# Altium PCB base.PcbDoc
Units mm, origin at the board's own origin, x right, y up, seen from the top; angles counter-clockwise.
Board outline 30 x 32.5 mm, 2 copper layers (Top Layer, Bottom Layer); 20 components, 20 nets, 94 pads, 15 vias.
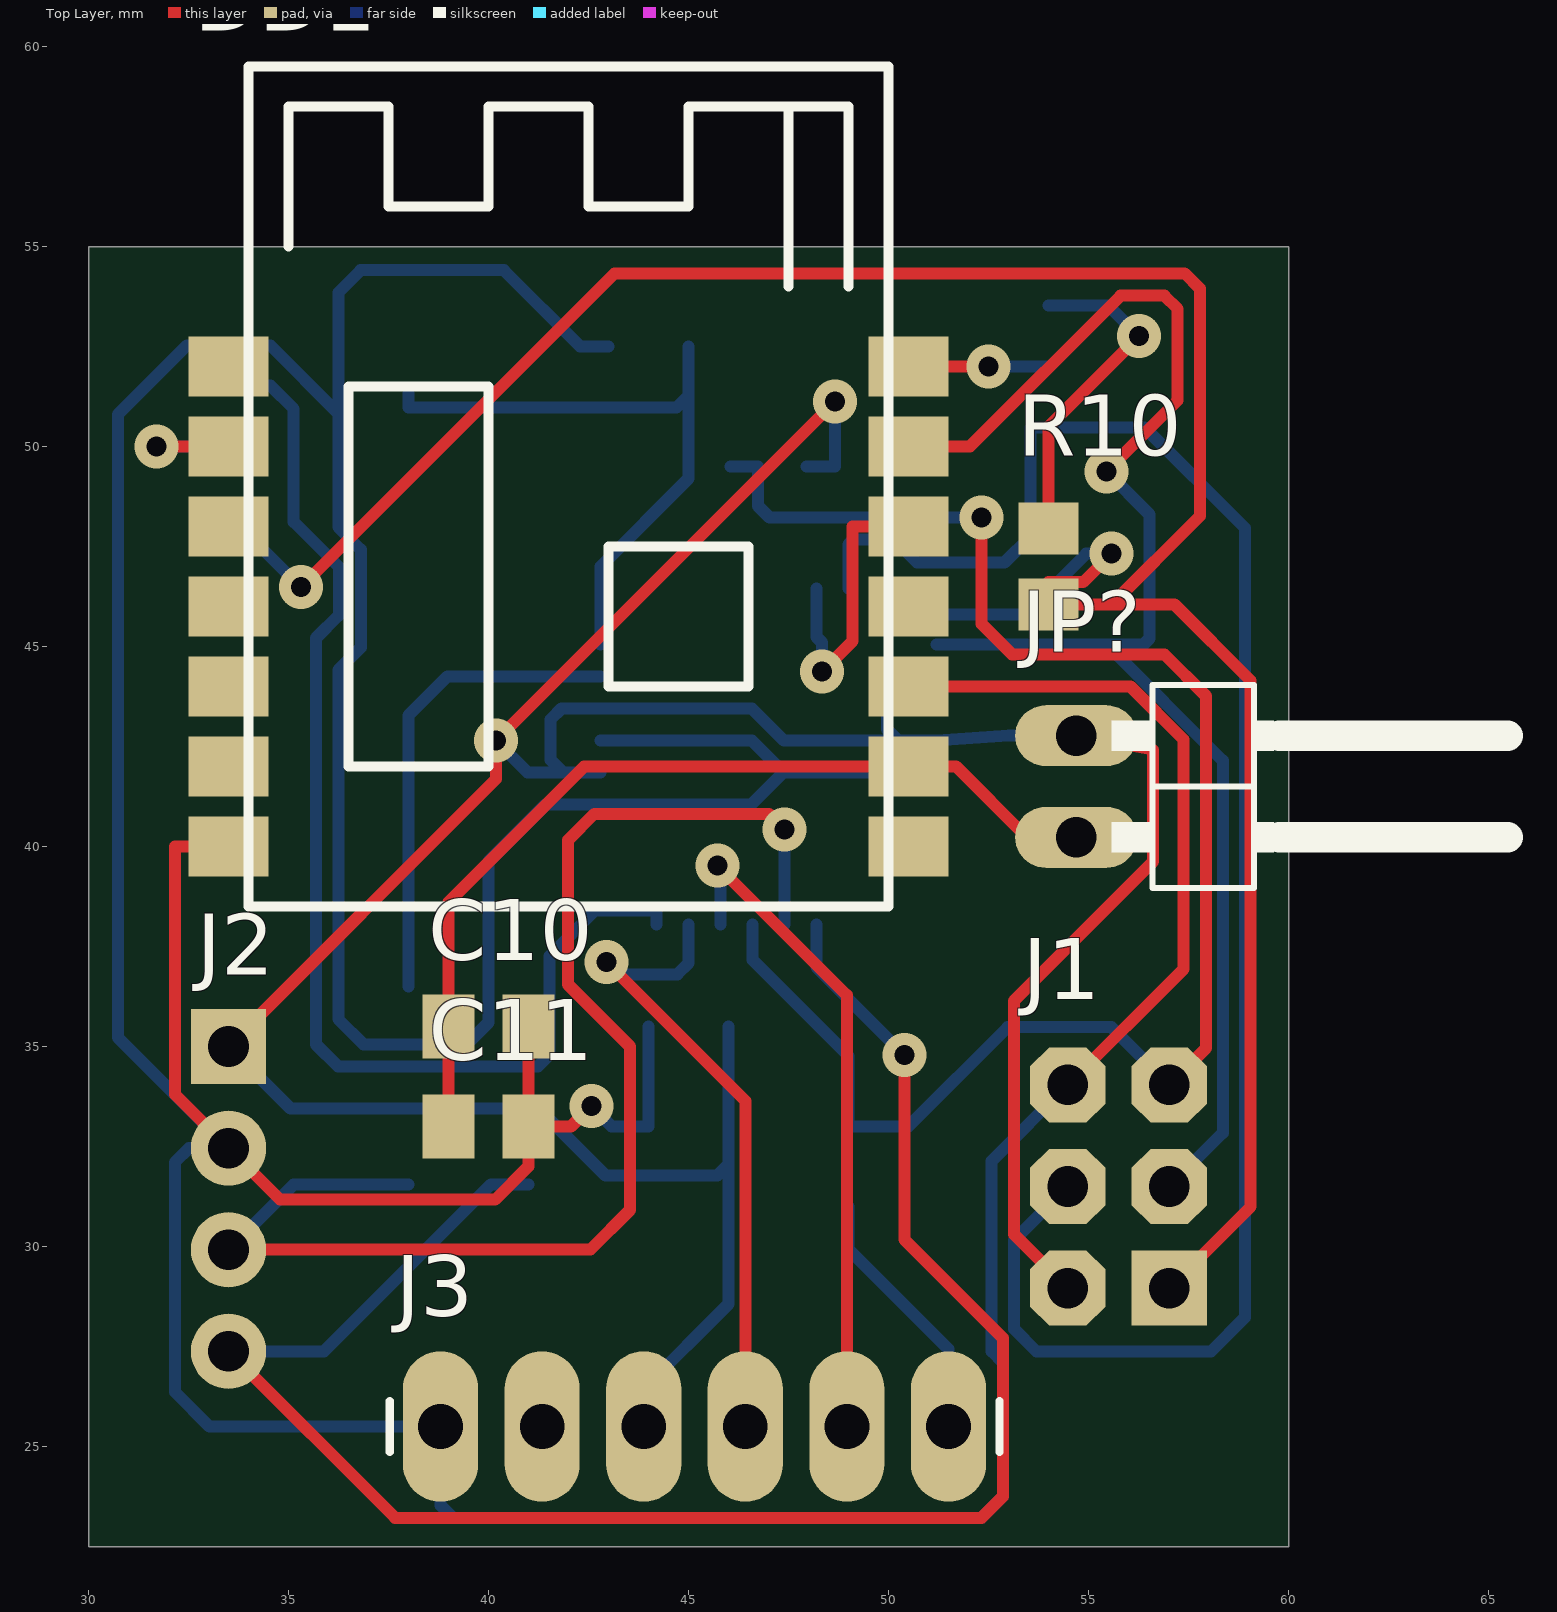
[diagram p0: Top Layer view]
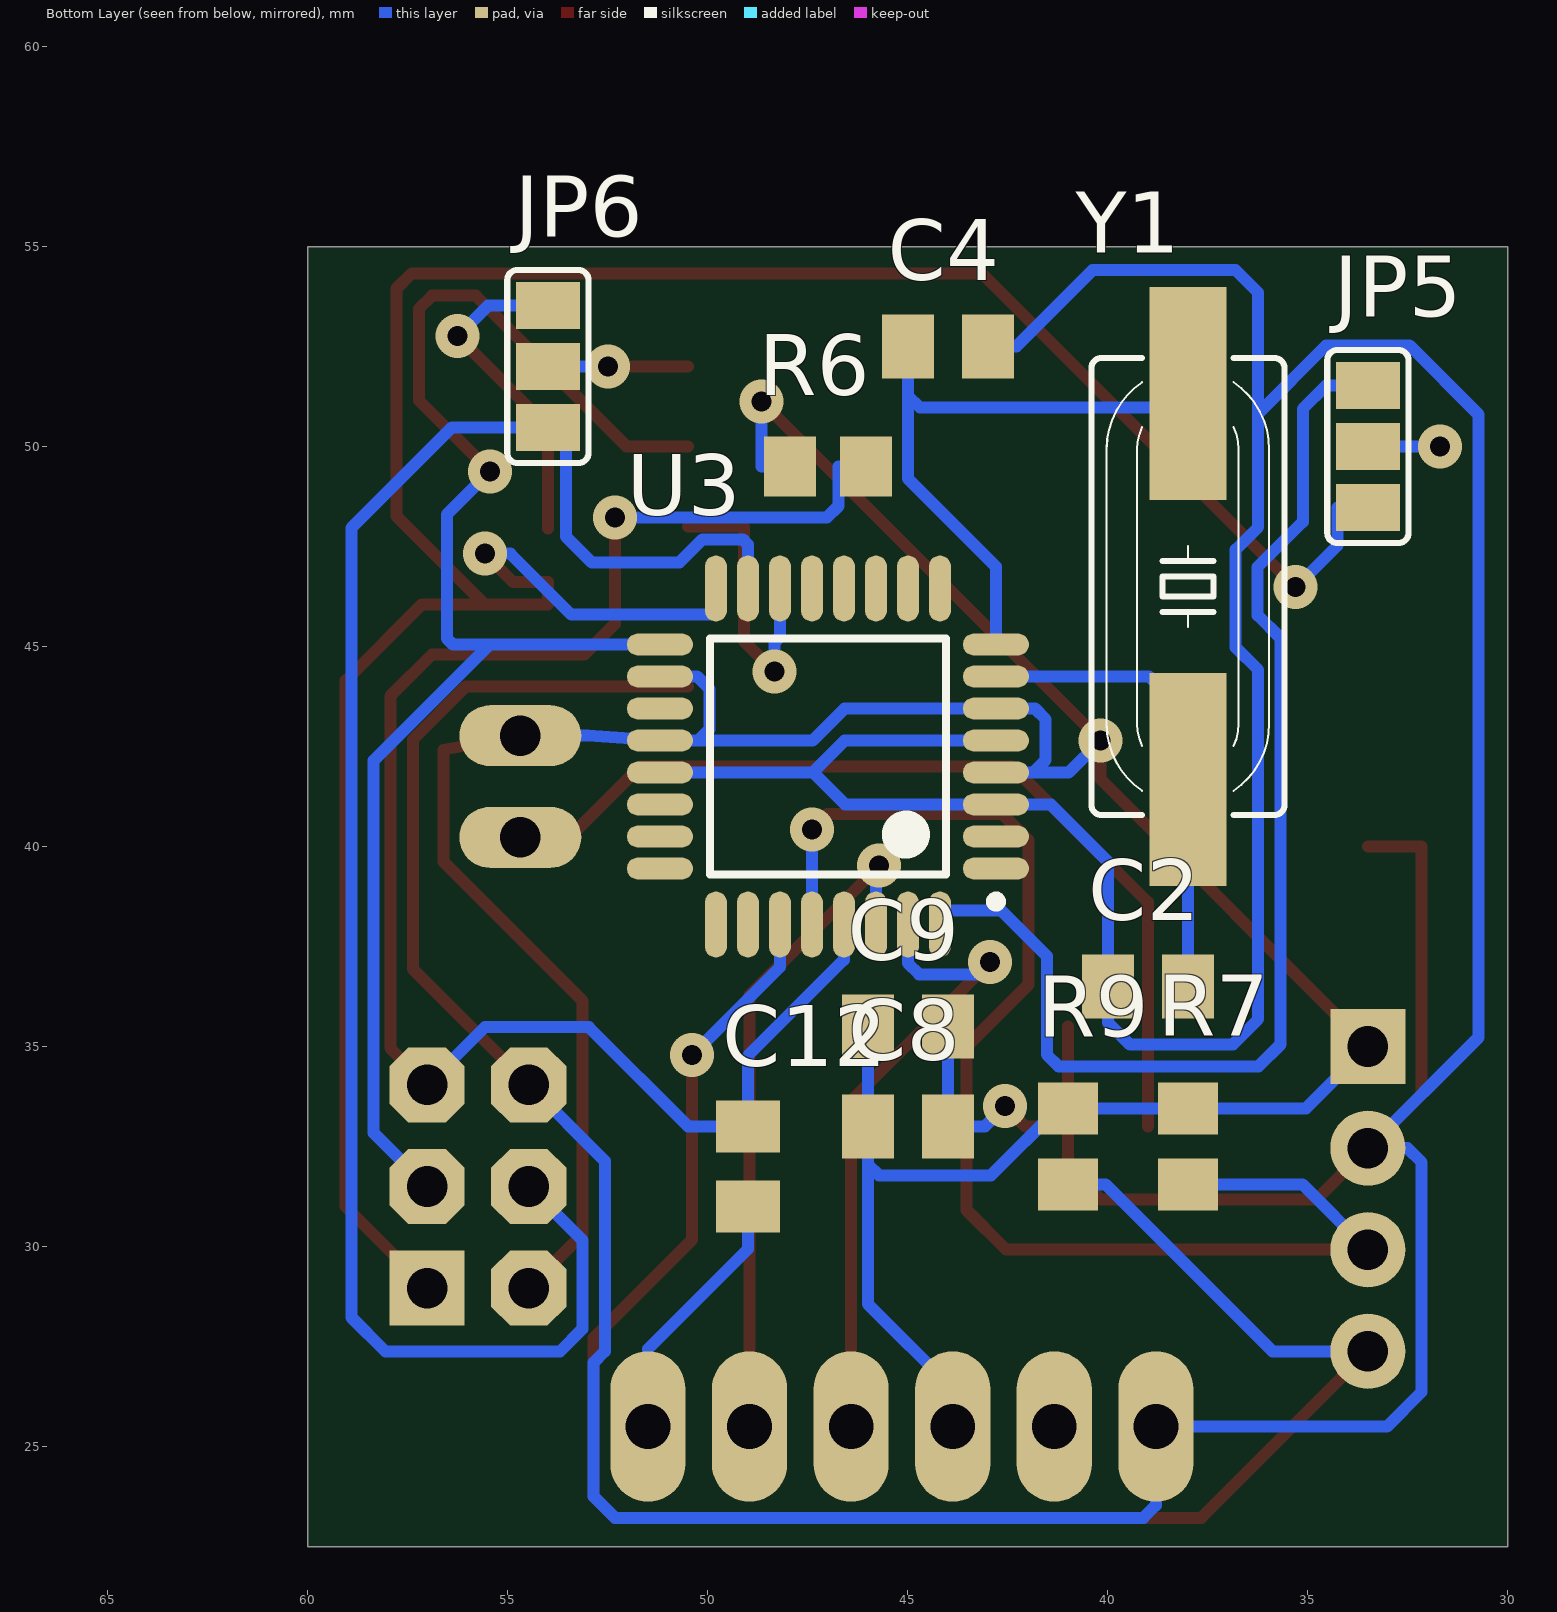
[diagram p1: Bottom Layer view, seen from below]

## Layer stack, top to bottom
Top Solder: solder mask 0.0102, Solder Resist, Dk 3.5
Top Layer: signal copper 0.0356
Dielectric 1: dielectric 0.32, FR-4, Dk 4.8
Bottom Layer: signal copper 0.0356
Bottom Solder: solder mask 0.0102, Solder Resist, Dk 3.5

## Board outline
30,22.5 30,55 60,55 60,22.5

## Design rules (kind name [scope] priority, off if disabled: settings)
Clearance [All] p1: gap=0.25
PolygonConnect [All] p1: connectstyle=Relief reliefconductorwidth=0.254 reliefentries=4 polygonreliefangle="90 Angle" airgapwidth=0.254
RoomDefinition base [InComponentClass('base')] p1: confinementstyle=ConfineIn formatcopy=TRUE lockcomponents=FALSE outline 13.446,16.645 365.998,16.645 365.998,146.312 13.446,146.312
RoutingVias [All] p1: holewidth=0.5 width=1.1 viastyle="Through Hole" minholewidth=0.4 minwidth=1 maxholewidth=0.6 maxwidth=1.2
SolderMaskExpansion [All] p1: expansion=0.102
Width [All] p1: maxlimit=0.4 minlimit=0.25 preferedwidth=0.3
30 further rules are at their usual default settings.

## Components (designator, comment, footprint, x,y, rotation, side; value= is the part's Value field where it differs from the comment)
C2 "22n" C0805K 39,36.5 r0 bottom
C4 "22n" C0805K 44,52.5 r0 bottom
C8 "100n" C0805K 45,33 r180 bottom
C9 "100n" C0805K 45,35.5 r180 bottom
C10 "10u" C0805K 40,35.5 r0 top
C11 "10u" C0805K 40,33 r0 top
C12 "100n" C0805K 49,32 r90 bottom
DD1 "A7105" A7105 34,39.5 r0 top
J1 "" 2X3-NS 55.75,31.5 r90 top
J2 "" 1X04_NO_SILK 33.5,35 r270 top
J3 "" 1X06_LONGPADS 51.5,25.5 r180 top
JP5 "" PAD-JUMPER-3-NO_YES_SILK_FULL_BOX 33.5,50 r270 bottom
JP6 "" PAD-JUMPER-3-NO_YES_SILK_FULL_BOX 54,52 r90 bottom
JP? "PIN HEADER" 1X02/90 58.5,41.5 r270 top
R6 "10k" R0805 47,49.5 r0 bottom
R7 "10k" R0805 38,32.5 r90 bottom
R9 "10k" R0805 41,32.5 r90 bottom
R10 "2k" R0805 54,47 r270 top
U3 "ATmega328-AU" 32A_N 47,42.25 r0 bottom
Y1 "16MHz" HC49UP 38,46.5 r270 bottom

## Footprints (in the part's own frame and the unit in brackets; to place one, negate y for a bottom-side part, rotate by r counter-clockwise, add the part's x,y. Pads: shape width x height; smd on the part's side, far side on the other; paste and mask are expansions set on the pad)
1X02/90 [mil]
  oval 60x120 hole 40: 1(-50,-150) 2(50,-150)
  silkscreen extent -100,-115 100,275
1X04_NO_SILK [mil]
  rect 74x74 hole 40: 1(0,0)
  round 74 hole 40: 2(100,0) 3(200,0) 4(300,0)
1X06_LONGPADS [mil]
  oval 74x148 hole 44: 1(0,0) 2(100,0) 3(200,0) 4(300,0) 5(400,0) 6(500,0)
  silkscreen extent -50,-25 550,25
2X3-NS [mil]
  rect 74x74 hole 40: 1(-100,-50)
  oct 74x74 hole 40: 2(-100,50) 3(0,-50) 4(0,50) 5(100,-50) 6(100,50)
32A_N [mm] "Thin QFP, 32-Leads, Body 7x7mm, Pitch 0.8mm, IPC Medium Density"
  oval 1.65x0.55 smd: 1(-4.2,2.8) 2(-4.2,2) 3(-4.2,1.2) 4(-4.2,0.4) 5(-4.2,-0.4) 6(-4.2,-1.2) 7(-4.2,-2) 8(-4.2,-2.8) 17(4.2,-2.8) 18(4.2,-2) 19(4.2,-1.2) 20(4.2,-0.4) 21(4.2,0.4) 22(4.2,1.2) 23(4.2,2) 24(4.2,2.8)
  oval 0.55x1.65 smd: 9(-2.8,-4.2) 10(-2,-4.2) 11(-1.2,-4.2) 12(-0.4,-4.2) 13(0.4,-4.2) 14(1.2,-4.2) 15(2,-4.2) 16(2.8,-4.2) 25(2.8,4.2) 26(2,4.2) 27(1.2,4.2) 28(0.4,4.2) 29(-0.4,4.2) 30(-1.2,4.2) 31(-2,4.2) 32(-2.8,4.2)
  silkscreen extent -4.32,-2.95 2.95,3.75, body extent -3.5,-3.5 3.5,3.5, height 1.2
A7105 [mm]
  rect 2x1.5 smd: 1(-0.5,12.5) 2(-0.5,10.5) 3(-0.5,8.5) 4(-0.5,6.5) 5(-0.5,4.5) 6(-0.5,2.5) 7(-0.5,0.5) 8(16.5,0.5) 9(16.5,2.5) 10(16.5,4.5) 11(16.5,6.5) 12(16.5,8.5) 13(16.5,10.5) 14(16.5,12.5)
  silkscreen extent 0,-1 16,20
C0805K [mm]
  rect 1.3x1.6 smd: 1(-1,0) 2(1,0)
HC49UP [mil]
  rect 210x76 smd: 1(-190,0) 2(190,0)
  silkscreen extent -225,-95 225,95
PAD-JUMPER-3-NO_YES_SILK_FULL_BOX [mil]
  rect 46x63 smd: 1(-60,0) 2(0,0) 3(60,0)
  silkscreen extent -95,-40 95,40
R0805 [mm]
  rect 1.3x1.5 smd: 1(-0.95,0) 2(0.95,0)

## Part data
C2 C4 C8 C9 C10 C11 C12: library part C-EUC0805K
DD1: library part Component_1
J1: library part AVR_SPI_PRG_6NS
J2: library part I2C_STANDARD_NO_SILK
J3: library part ARDUINO_SERIAL_PROGRAMLONGPADS
JP5 JP6: library part JUMPER-PAD-3-NOFULL_BOX_SILK
JP?: library part PINHD-1X2/90
R6 R7 R9 R10: library part R-EU_R0805
U3: "8-bit AVR Microcontroller, 32KB Flash, 1KB EEPROM, 2KB SRAM, 32-pin TQFP, Industrial Grade (-40°C to 85°C)"
Y1: library part CRYSTALSMD

## Via types
v1: diameter 1.1, hole 0.5, Top Layer to Bottom Layer, 15 vias

## Nets (pads, with @x,y where several pads share a name; then routed paths per layer and width w, separated by ;. In a path a pad name is that pad's centre, name@x,y a point inside that pad or via, vN(x,y) a via of type N, cw(c..) or ccw(c..) an arc to the next point about the centre after c; other vN are vias at no path point)
GND: C2.2 C4.1 C8.2 C9.2 C10.2 C11.2 DD1.7 DD1.10 J1.6 J2.2 J3.6 U3.3 U3.5 U3.21 | length 164.4
  Top Layer w0.3: DD1.7 32.156,40 32.156,33.804 J2.2 34.79,31.17 40.166,31.17 41,32.004 C11.2 ; C10.2 C11.2 ; v1(42.57,33.508) 42.062,33 C11.2 ; DD1.10 56.051,44 57.379,42.672 57.379,36.939 J1.6
  Bottom Layer w0.3: v1(42.57,33.508) 43.078,33 C8.2 C9.2 ; U3.5 46.584,42.65 47.384,41.85 ; C4.1 42.291,52.5 40.384,54.407 36.805,54.407 36.246,53.848 36.246,50.825 ; U3.21 47.384,41.85 ; J1.6 52.578,32.138 52.578,27.381 52.857,27.102 52.857,23.749 52.324,23.216 39.116,23.216 38.8,23.532 J3.6 38.8,25.502 33.02,25.502 32.156,26.365 32.156,32.104 32.512,32.46 J2.2 30.734,35.226 30.734,50.8 32.461,52.527 34.544,52.527 36.246,50.825 ; 36.246,50.825 36.246,47.982 36.806,47.422 36.806,44.977 36.246,44.417 36.246,35.685 36.879,35.052 39.45,35.052 40,35.602 C2.2 40,39.624 41.426,41.05 U3.3 46.571,41.05 47.371,41.85 47.384,41.85
INT1: JP5.1 U3.32 | length 30.6
  Bottom Layer w0.3: JP5.1 34.544,51.524 35.128,50.94 35.128,48.118 36.256,46.99 36.256,45.781 35.687,45.212 35.687,35.052 36.239,34.5 41.231,34.5 41.529,34.798 41.529,37.262 42.672,38.405 44.2,38.405 U3.32
INT2: U3.1
MISO: J1.1 JP5.3 R10.2 U3.16 | length 69.3
  Top Layer w0.3: v1(35.306,46.482) 43.155,54.331 57.404,54.331 57.785,53.95 57.785,48.26 55.575,46.05 ; v1(55.575,47.32) 54.864,46.609 54,46.609 R10.2 55.575,46.05 ; J1.1 59.055,30.995 59.055,44.145 57.15,46.05 55.575,46.05
  Bottom Layer w0.3: JP5.3 34.265,48.476 34.265,47.523 v1(35.306,46.482) ; U3.16 49.8,45.796 53.416,45.796 54.94,47.32 v1(55.575,47.32)
MOSI: J1.4 JP6.1 U3.15 | length 45.5
  Bottom Layer w0.3: U3.15 49,47.551 49.124,47.675 50.14,47.675 50.715,47.1 52.9,47.1 53.552,47.752 53.552,50.476 JP6.1 56.4,50.476 58.91,47.966 58.91,28.227 58.064,27.381 53.696,27.381 53.137,27.94 53.137,30.157 J1.4
NetC2_1: C2.1 U3.7 Y1.2 | length 12
  Bottom Layer w0.3: C2.1 38,39.065 Y1.2 38,43.282 38.968,44.25 U3.7
NetC4_2: C4.2 U3.8 Y1.1 | length 15.8
  Bottom Layer w0.3: Y1.1 38,50.978 44.704,50.978 45,51.274 ; U3.8 42.799,46.999 45,49.2 45,51.274 ; C4.2 45,51.274
NetC12_1: C12.1 J3.1 | length 6.5
  Bottom Layer w0.3: C12.1 49,29.932 51.5,27.432 J3.1
NetDD1_2: DD1.2 JP5.2 | length 3.6
  Top Layer w0.3: v1(31.699,50) DD1.2
  Bottom Layer w0.3: v1(31.699,50) JP5.2
NetDD1_14: DD1.14 JP6.2 | length 3.5
  Top Layer w0.3: DD1.14 v1(52.502,52)
  Bottom Layer w0.3: v1(52.502,52) JP6.2
NetJP6_3: JP6.3 R10.1 | length 8.3
  Top Layer w0.3: R10.1 54,50.498 v1(56.261,52.759)
  Bottom Layer w0.3: JP6.3 55.496,53.524 v1(56.261,52.759)
R\E\S\E\T\: C12.2 J1.5 R6.1 U3.29 | length 42.2
  Top Layer w0.3: v1(52.324,48.225) 52.324,45.568 53.086,44.806 56.896,44.806 57.937,43.764 57.937,34.957 J1.5
  Bottom Layer w0.3: R6.1 46.736,49.5 46.736,48.514 47.025,48.225 v1(52.324,48.225) ; U3.29 46.6,37.169 49,34.769 C12.2 50.495,33 52.979,35.484 55.576,35.484 J1.5
RXI: J3.2 U3.30 | length 16.9
  Top Layer w0.3: v1(45.72,39.522) 48.96,36.282 J3.2
  Bottom Layer w0.3: v1(45.72,39.522) 45.8,39.442 U3.30
S\S\: DD1.12 U3.14 | length 7.5
  Top Layer w0.3: v1(48.336,44.374) 49.098,45.136 49.098,48 DD1.12
  Bottom Layer w0.3: U3.14 48.2,45.237 48.336,45.101 v1(48.336,44.374)
SCK: DD1.13 J1.3 U3.17 | length 38.5
  Top Layer w0.3: DD1.13 52.032,50 55.804,53.772 56.896,53.772 57.226,53.442 57.226,51.156 v1(55.448,49.378)
  Bottom Layer w0.3: U3.17 55.458,45.05 ; v1(55.448,49.378) 56.525,48.301 56.525,45.202 56.373,45.05 55.458,45.05 ; J1.3 58.36,32.84 58.36,42.148 55.458,45.05
SCL: J2.3 R7.1 U3.28 | length 33.7
  Top Layer w0.3: J2.3 42.544,29.92 43.536,30.912 43.536,35.001 41.986,36.551 41.986,40.157 42.647,40.818 47.012,40.818 v1(47.4,40.43)
  Bottom Layer w0.3: J2.3 35.13,31.55 R7.1 ; U3.28 v1(47.4,40.43)
SDA: J2.4 R9.1 U3.27 | length 46.8
  Top Layer w0.3: J2.4 37.664,23.216 52.324,23.216 52.857,23.749 52.857,27.711 50.394,30.175 v1(50.394,34.789)
  Bottom Layer w0.3: J2.4 35.886,27.38 40.056,31.55 R9.1 ; U3.27 48.2,36.982 v1(50.394,34.789)
TXO: J3.3 U3.31 | length 16.3
  Top Layer w0.3: v1(42.951,37.109) 46.42,33.641 J3.3
  Bottom Layer w0.3: v1(42.951,37.109) 43.256,36.805 44.721,36.805 45,37.084 U3.31
VCC: C8.1 C9.1 J1.2 J2.1 J3.4 JP?.1 R6.2 R7.2 R9.2 U3.4 U3.6 U3.18 U3.20 | length 87.8
  Top Layer w0.3: J2.1 40.183,41.683 v1(40.183,42.647) v1(48.666,51.13) ; J1.2 53.137,30.303 53.137,36.144 56.617,39.624 56.617,42.418 JP?.1
  Bottom Layer w0.3: J2.1 35.05,33.45 R7.2 R9.2 41,33.452 41.25,33.452 42.926,31.775 45.72,31.775 46,32.055 ; v1(40.183,42.647) 40.979,41.85 41.868,41.85 ; U3.4 41.868,41.85 ; J3.4 43.88,26.441 46,28.561 46,32.055 ; C9.1 C8.1 46,32.055 ; R6.2 48.666,49.5 v1(48.666,51.13) ; U3.18 50.27,44.25 49.962,43.942 49.962,42.926 50.238,42.65 ; JP?.1 53.003,42.77 U3.20 50.238,42.65 ; 41.868,41.85 41.554,42.164 41.554,43.18 41.824,43.45 U3.6 46.584,43.45 47.384,42.65 50.238,42.65
VCCA: C10.1 C11.1 DD1.9 JP?.2 | length 23.4
  Top Layer w0.3: C11.1 C10.1 39,38.608 42.392,42 DD1.9 51.689,42 53.459,40.23 JP?.2
pads on no net: DD1.1 DD1.3 DD1.4 DD1.5 DD1.6 DD1.8 DD1.11 J3.5 U3.2 U3.9 U3.10 U3.11 U3.12 U3.13 U3.19 U3.22 U3.23 U3.24 U3.25 U3.26